# Altium PCB PCB1.PcbDoc
Units mil, origin at the board's own origin, x right, y up, seen from the top; angles counter-clockwise.
Board outline 3800 x 3800 mil, 4 copper layers (Top Layer, Int1 (GND), Int2 (PWR), Bottom Layer), stack 53.912 mil thick; 44 components, 44 nets, 213 pads, 82 vias.
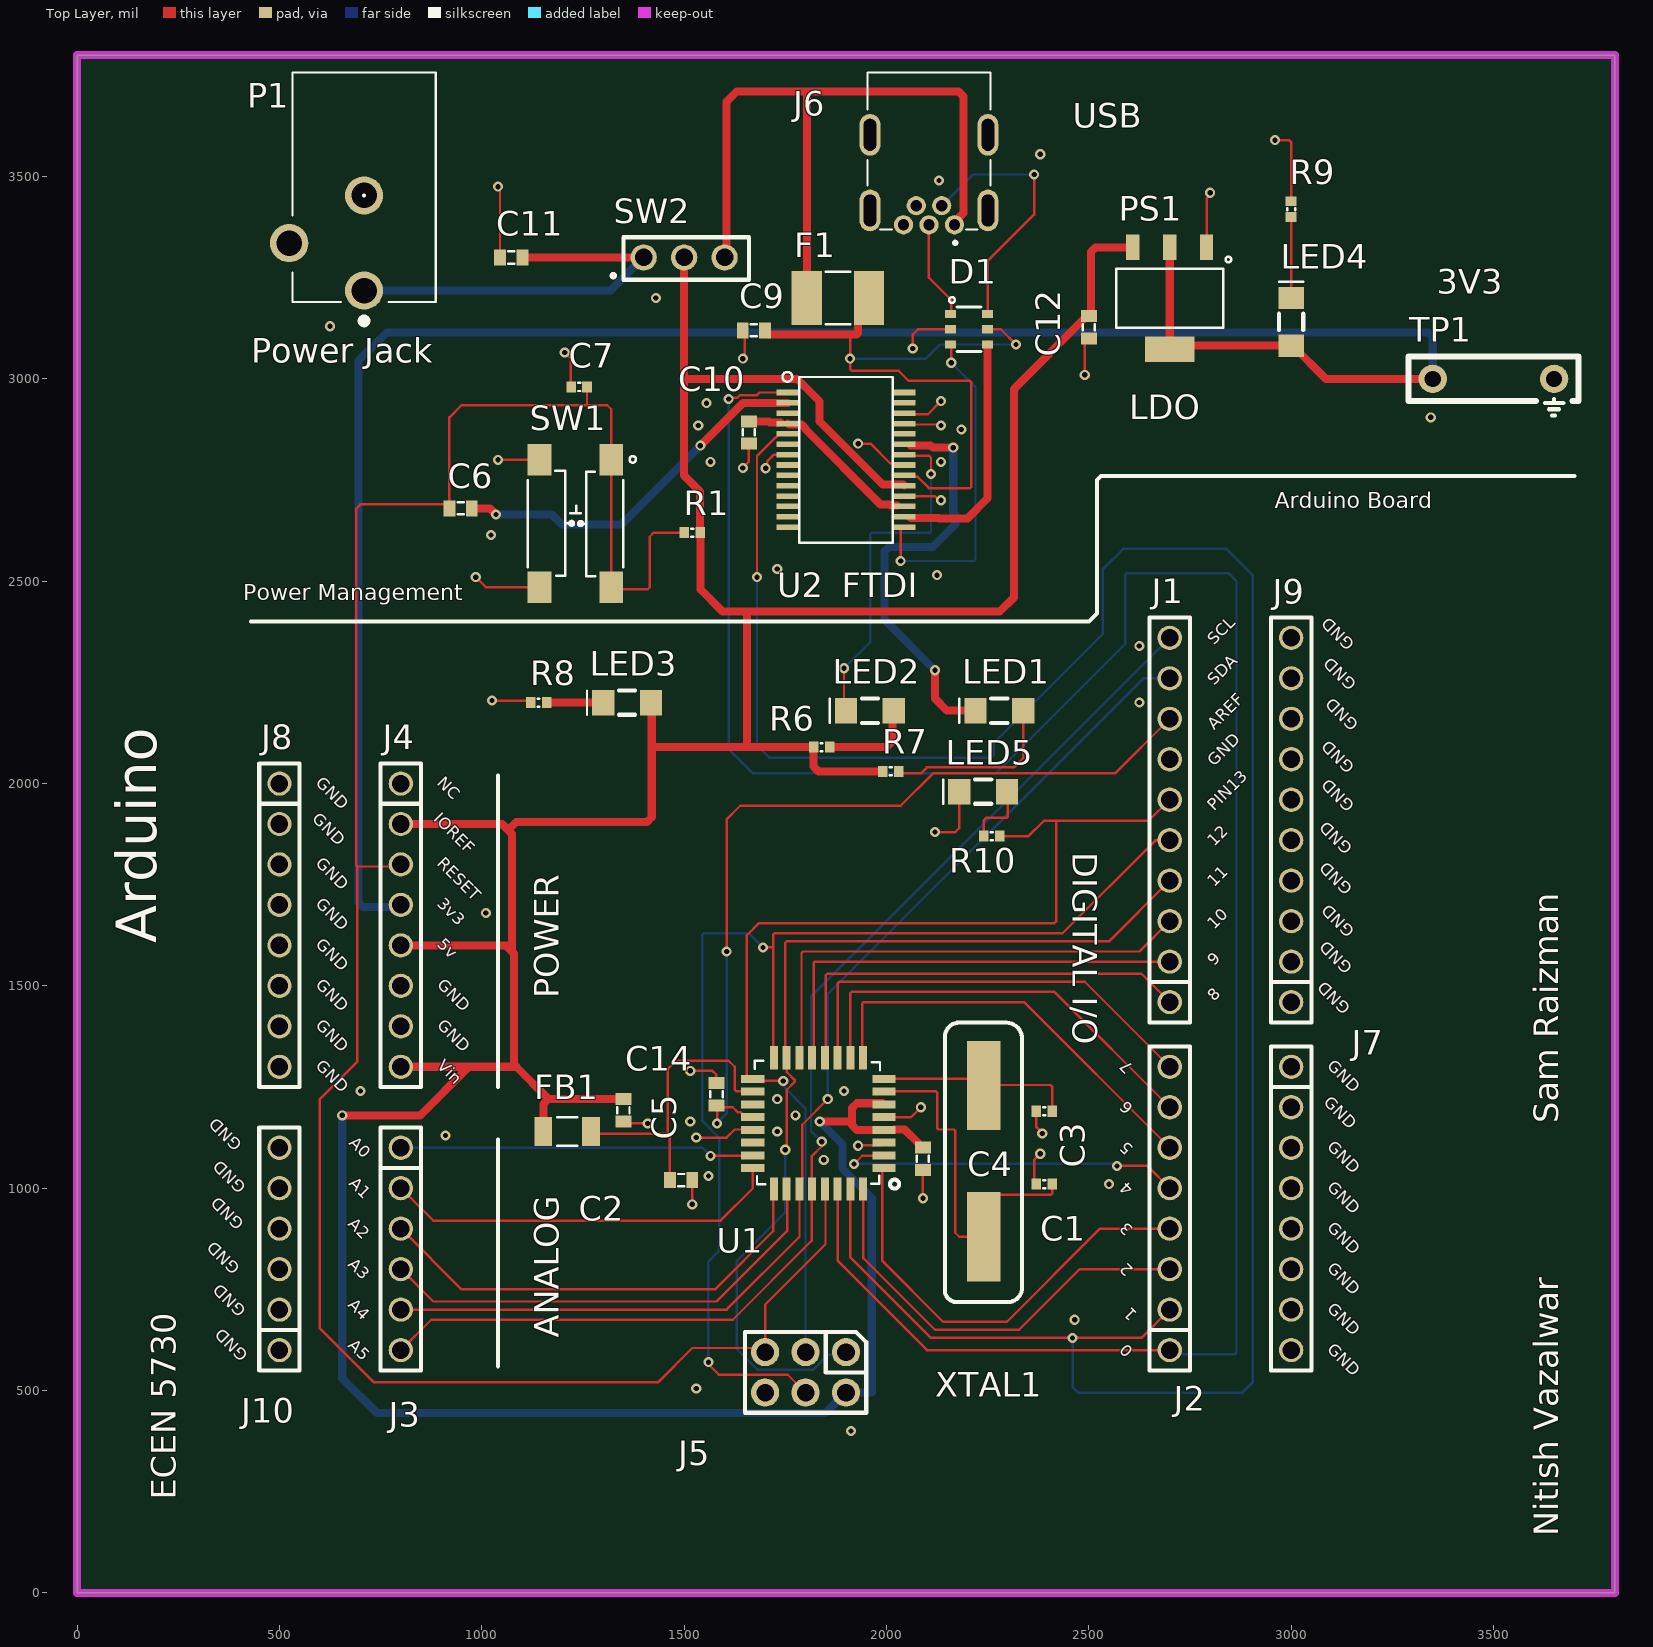
[diagram p0: Top Layer view]
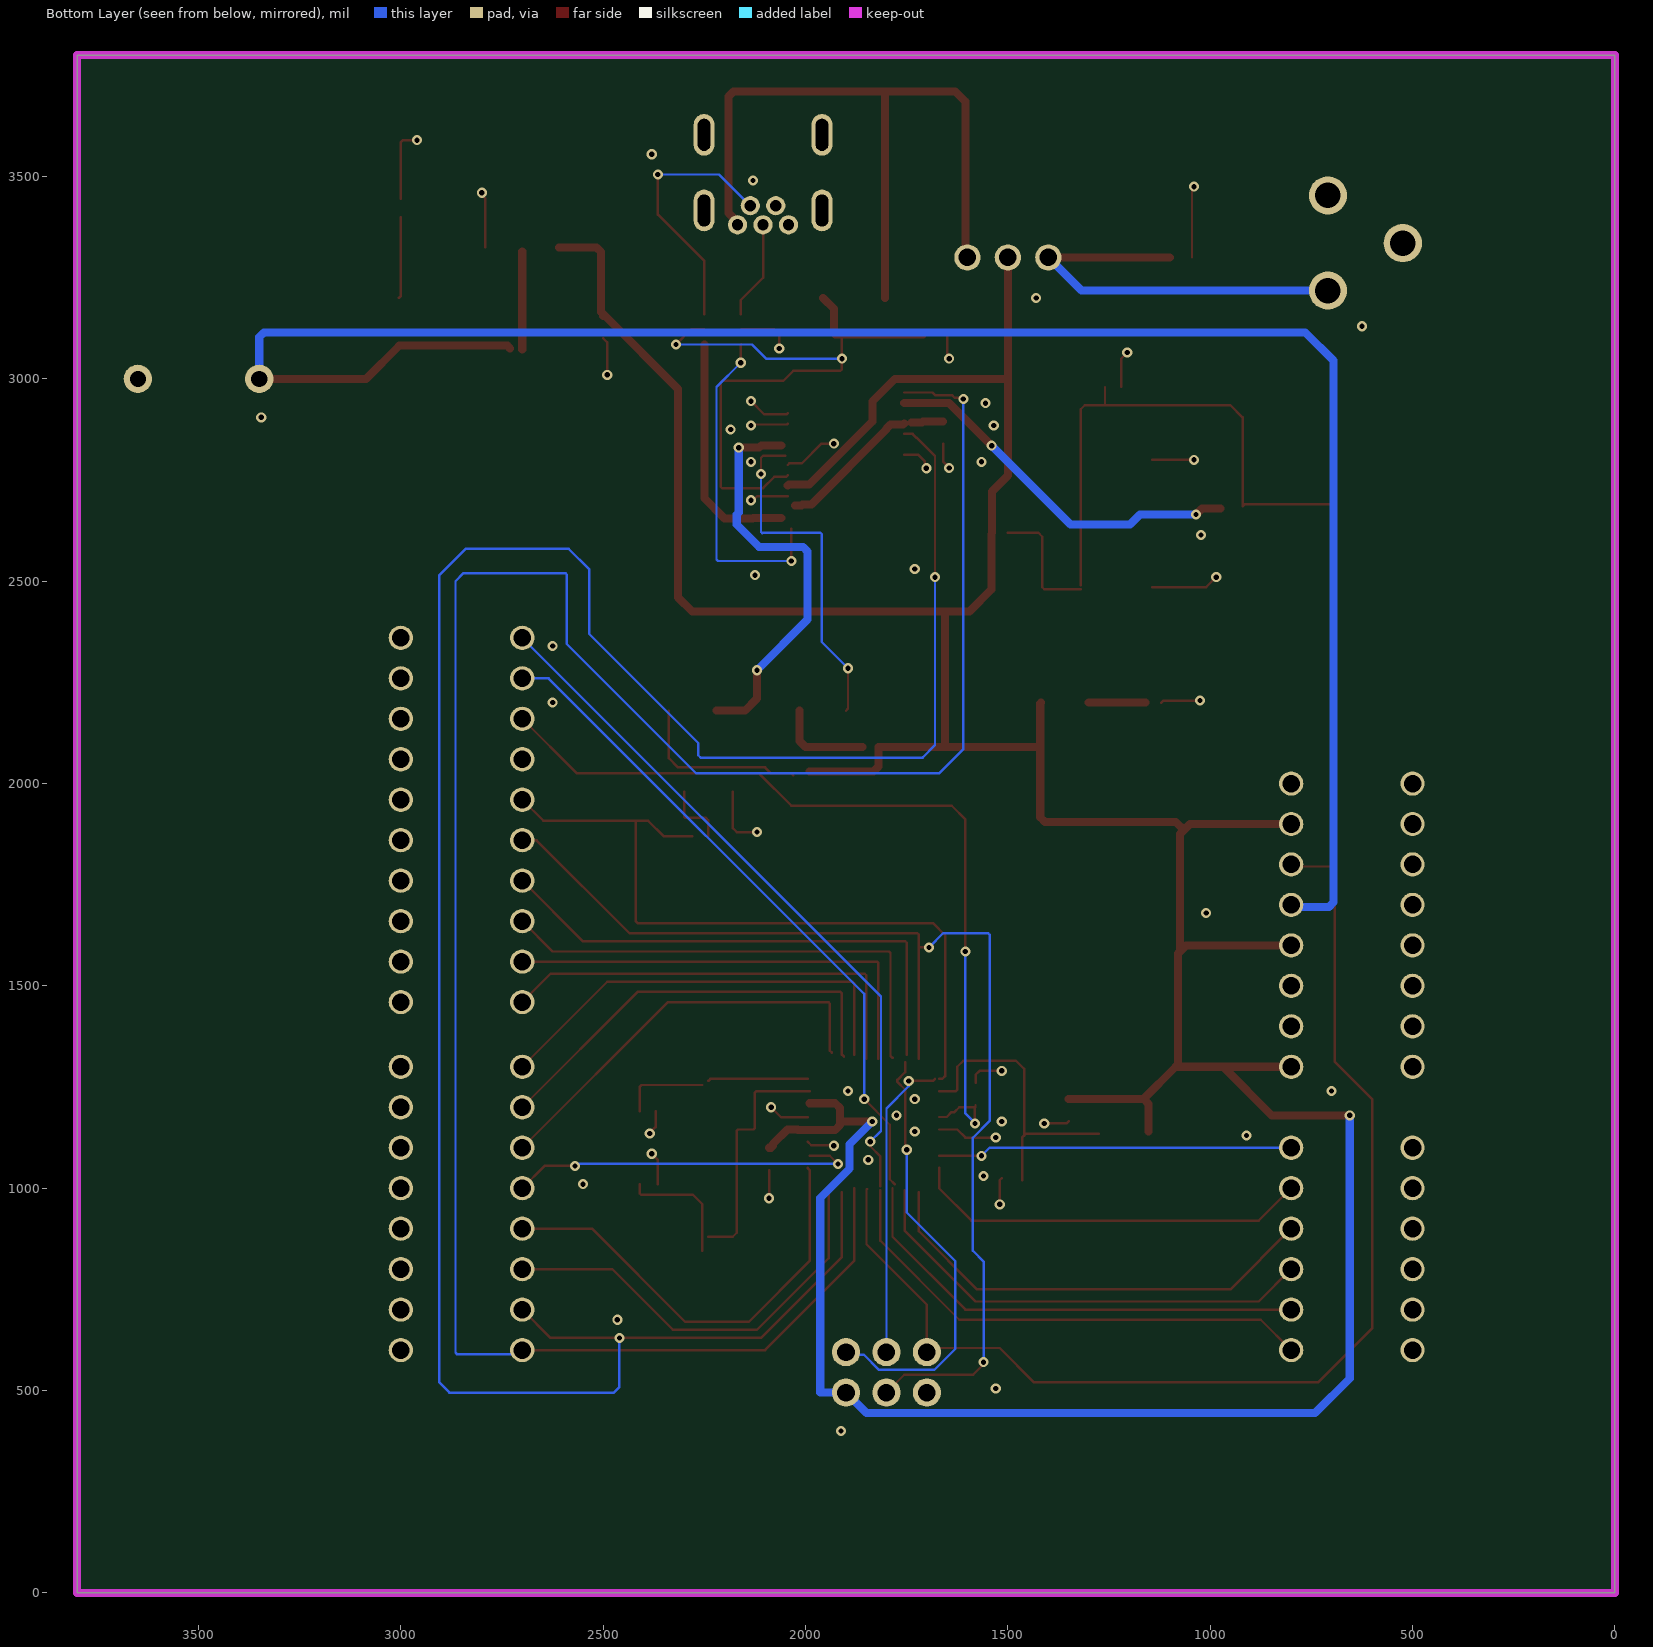
[diagram p1: Bottom Layer view, seen from below]
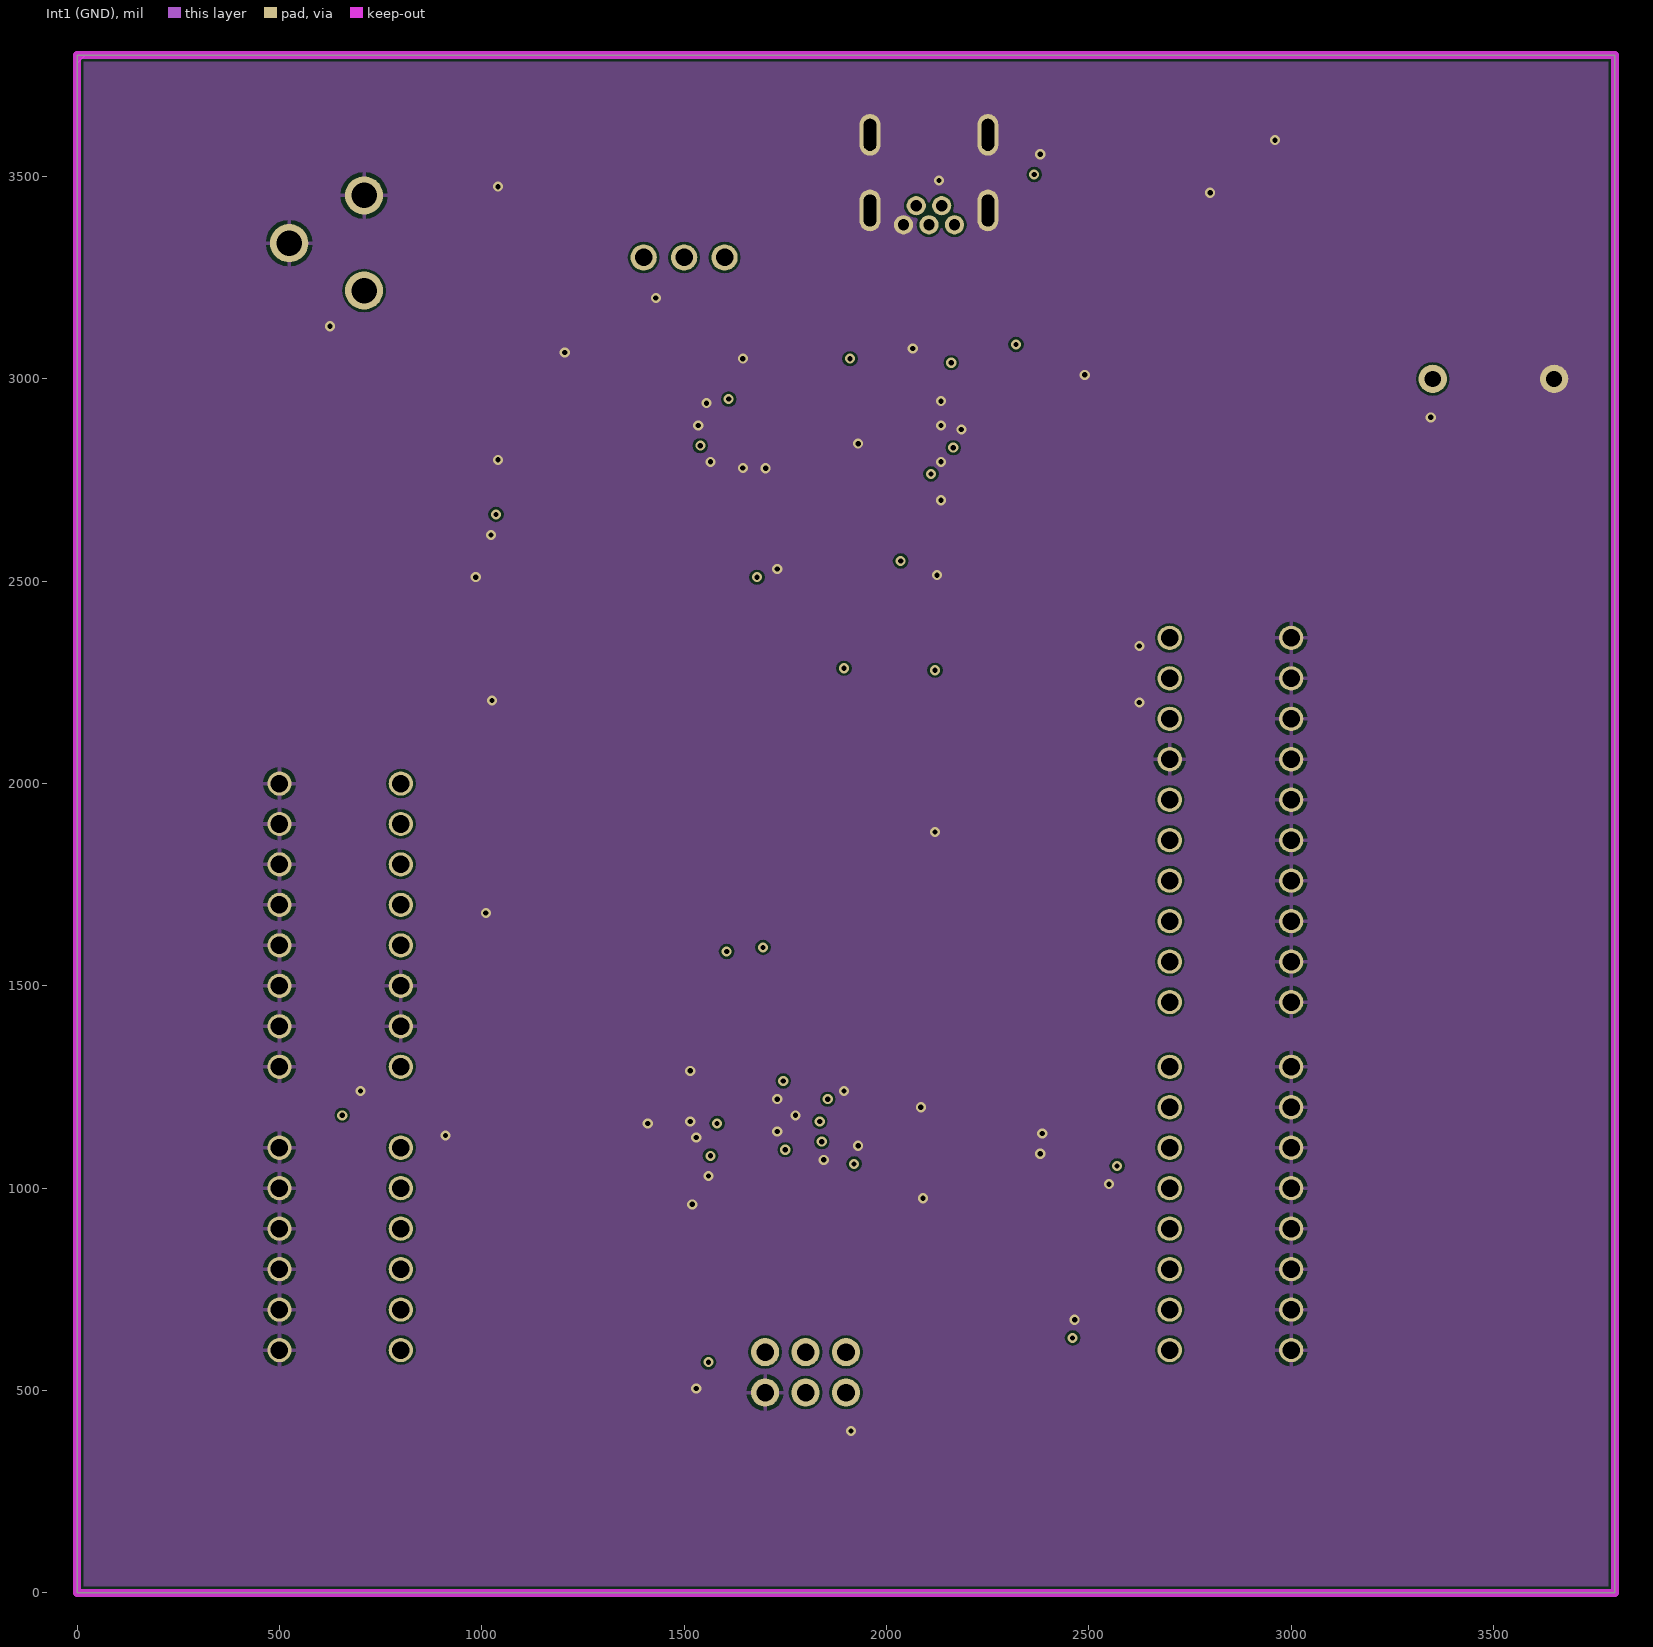
[diagram p2: Int1 (GND)]
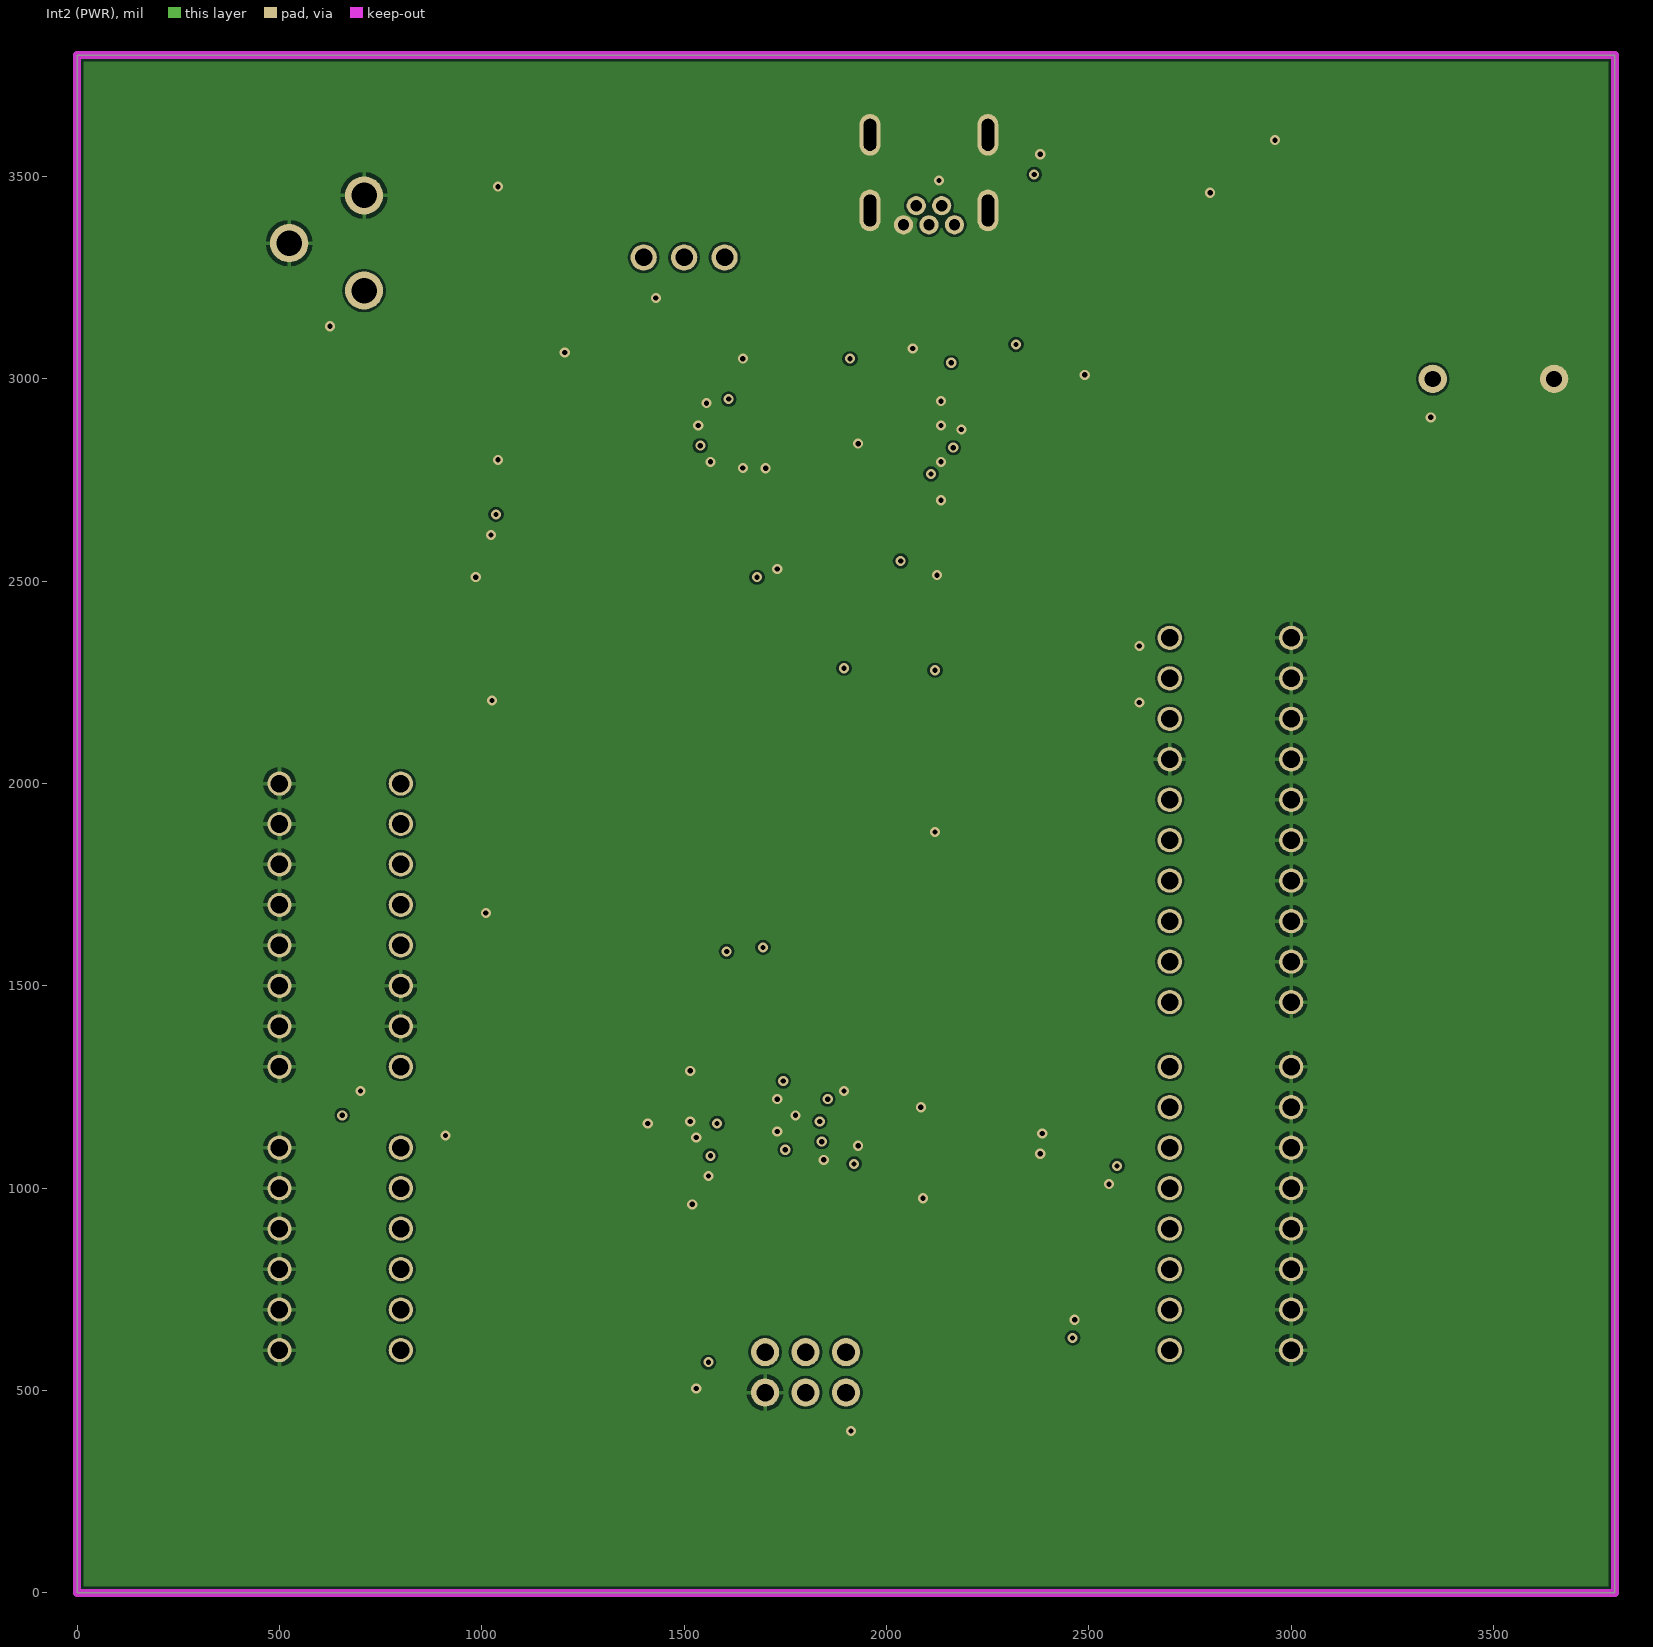
[diagram p3: Int2 (PWR)]

## Layer stack, top to bottom
Top Solder: solder mask 1, SM-001, Dk 4
Top Layer: signal copper 1.378
Dielectric 1: prepreg 5.1, PP-017, Dk 4.3
Dielectric 2: prepreg 5.1, PP-017, Dk 4.3
Int1 (GND): signal copper 1.378
Dielectric 3: core 28, Core-039, Dk 4.8
Int2 (PWR): signal copper 1.378
Dielectric 4: prepreg 5.1, PP-017, Dk 4.3
Dielectric 5: prepreg 5.1, PP-017, Dk 4.3
Bottom Layer: signal copper 1.378
Bottom Solder: solder mask 1, SM-001, Dk 4

## Board outline
0,0 3800,0 3800,3800 0,3800

## Design rules (kind name [scope] priority, off if disabled: settings)
Clearance [All] p1: gap=6 ignorepadtopadclearanceinfootprint=FALSE
PlaneClearance [All] p1: clearance=10
PlaneConnect [All] p1: planeconnectstyle=Direct reliefexpansion=20 reliefentries=4 reliefconductorwidth=10 reliefairgap=10
PolygonConnect [All] p1: connectstyle=Direct reliefconductorwidth=10 reliefentries=4 polygonreliefangle="90 Angle" airgapwidth=10
RoutingVias [All] p1: holewidth=13 width=25 viastyle="Through Hole" minholewidth=13 minwidth=25 maxholewidth=60 maxwidth=80
SolderMaskExpansion [All] p1: expansion=4 istentingtop=FALSE
UnRoutedNet [All] p1: checkbadconnections=TRUE
Width "Schematic Width Constraint_2" [InNet('5V')] p1: maxlimit=100 minlimit=10 preferedwidth=20 midlayer1_maxwidth=10 midlayer1_prefwidth=10 midlayer2_maxwidth=10 midlayer2_prefwidth=10 minimp=50.000000 maximp=50.000000 favimp=50.000000
Width "Schematic Width Constraint_1" [InNet('USB_PWR')] p2: maxlimit=100 minlimit=10 preferedwidth=20 midlayer1_maxwidth=10 midlayer1_prefwidth=10 midlayer2_maxwidth=10 midlayer2_prefwidth=10 minimp=50.000000 maximp=50.000000 favimp=50.000000
Width "Schematic Width Constraint" [InNet('NetC11_1')] p3: maxlimit=100 minlimit=10 preferedwidth=20 midlayer1_maxwidth=10 midlayer1_prefwidth=10 midlayer2_maxwidth=10 midlayer2_prefwidth=10 minimp=50.000000 maximp=50.000000 favimp=50.000000
Width [All] p4: maxlimit=100 minlimit=6 preferedwidth=10 toplayer_prefwidth=6 midlayer1_minwidth=10 midlayer1_maxwidth=10 midlayer2_minwidth=10 midlayer2_maxwidth=10 bottomlayer_prefwidth=6 minimp=50.000000 maximp=50.000000 favimp=50.000000
27 further rules are at their usual default settings.

## Components (designator, comment, footprint, x,y, rotation, side; value= is the part's Value field where it differs from the comment)
C1 "22pF" 0402_Passive#1 2370.63,1010 r0 top
C2 "22uF" 0603_PASSIVE 1520,1020 r180 top
C3 "22pF" 0402_Passive#1 2370.63,1190 r0 top
C4 "22uF" 0603_PASSIVE 2090,1100 r270 top
C5 "22uF" 0603_PASSIVE 1350,1164.88 r90 top
C6 "22uF" 0603_PASSIVE 920,2680 r0 top
C7 "1uF" 0402_Passive#2 1260,2980 r180 top
C9 "22uF" 0603_PASSIVE 1700,3120 r180 top
C10 "22uF" 0603_PASSIVE 1660,2840 r90 top
C11 "22uF" 0603_PASSIVE 1100,3300 r180 top
C12 "22uF" 0603_PASSIVE 2500,3100 r90 top
C14 "22uF" 0603_PASSIVE 1580,1204.88 r90 top
D1 "IP4234CZ6,125" TVS 2158.46,3160 r0 top value="TVS DIODE 5.5V 6TSOP"
F1 "MF-MSMF050-2" FUSE 1880,3200 r0 top value="PTC RESET FUSE 15V 500MA 1812"
FB1 "FB_300mA_1206" 1206_Passive 1270,1140 r180 top
J1 "PPTC101LFBN-RC digital" 10_PIN_ARDUINO_100MIL 2700,1460 r90 top value=Female
J2 "PPTC081LFBN-RC" 8_PIN_ARDUINO_100MIL 2700,600 r90 top value=Female
J3 "PPTC061LFBN-RC analog" 6_PIN_ARDUINO_100mil 800,1100 r270 top value=Female
J4 "PPTC081LFBN-RC Power" 8_PIN_ARDUINO_100MIL 800,2000 r270 top value=Female
J5 "NRPN032PAEN-RC" ICSP 1900,595 r270 top
J6 "XM7D-0512" USB_2 2100,3571.21 r0 top value="CONN RCPT USB2.0 MINI B 5P R/A"
J7 "PPTC081LFBN-RC" 8_PIN_ARDUINO_100MIL 3000,1300 r270 top value=Female
J8 "PPTC081LFBN-RC" 8_PIN_ARDUINO_100MIL 500,2000 r270 top value=Female
J9 "PPTC101LFBN-RC" 10_PIN_ARDUINO_100MIL 3000,1460 r90 top value=Female
J10 "PPTC061LFBN-RC" 6_PIN_ARDUINO_100mil 500,600 r90 top value=Female
LED1 "LTST-C150CKT" LED 2220,2180 r90 top value=Blue
LED2 "LTST-C150CKT" LED 1900,2180 r90 top value=Blue
LED3 "LTST-C150CKT" LED 1300,2200 r90 top value=Red
LED4 "LTST-C150CKT" LED 3000,3200 r0 top
LED5 "LTST-C150CKT" LED 2180,1980 r90 top
P1 "Power Jack" Power_Jack 709,3218.3 r90 top value="CONN PWR JACK 2X5.5MM SOLDER"
PS1 "AZ1117CH-3.3TRG1" LDO 2700,3200 r0 top value="IC REG LINEAR 3.3V 800MA SOT223"
R1 "1k" 0402_Passive#1 1500,2620 r0 top value="1K Ohm"
R6 "1k" 0402_Passive#1 1820,2090 r0 top value="1K Ohm"
R7 "1k" 0402_Passive#1 1990.63,2030 r0 top value="1K Ohm"
R8 "1k" 0402_Passive#1 1120.63,2200 r0 top value="1K Ohm"
R9 "1k" 0402_Passive#1 3000,3400 r90 top value="1K Ohm"
R10 "1k" 0402_Passive#1 2240.63,1870 r0 top value="1K Ohm"
SW1 "TL3305AF160QG" Switch_JLC 1320,2800 r270 top value="SWITCH TACTILE SPST-NO 50MA 12V"
SW2 "PREC003SAAN-RC" 3_PIN_100mil 1400,3300 r0 top value="CONN HEADER VERT 3POS 2.54MM"
TP1 "10x Probe TP" TP10x_Probe 3500,3000 r0 top
U1 "ATMEGA328P-ANR" ATMega328P 1830,1160 r0 top value="IC MCU 8BIT 32KB FLASH 32TQFP"
U2 "FT232RL-REEL" FTDI 1900,2800 r0 top value="IC USB FS SERIAL UART 28-SSOP"
XTAL1 "ABLS-16.000MHZ-B4-T" Crystal 2240,1254.02 r270 top value="CRYSTAL 16.0000MHZ 18PF SMD"

## Footprints (in the part's own frame and the unit in brackets; to place one, negate y for a bottom-side part, rotate by r counter-clockwise, add the part's x,y. Pads: shape width x height; smd on the part's side, far side on the other; paste and mask are expansions set on the pad)
3_PIN_100mil [mm]
  round 1.65 hole 1.1: 1(0,0) 2(2.54,0) 3(5.08,0)
  silkscreen extent -2,-1.4 6.6,1.27
6_PIN_ARDUINO_100mil [mil]
  round 60 hole 43.31: 1(0,0) 2(100,0) 3(200,0) 4(300,0) 5(400,0) 6(500,0)
  silkscreen extent -50,-50 550,50
8_PIN_ARDUINO_100MIL [mil]
  round 60 hole 43.31: 1(0,0) 2(100,0) 3(200,0) 4(300,0) 5(400,0) 6(500,0) 7(600,0) 8(700,0)
  silkscreen extent -50,-50 750,50
10_PIN_ARDUINO_100MIL [mil]
  round 60 hole 43.31: 1(0,0) 2(100,0) 3(200,0) 4(300,0) 5(400,0) 6(500,0) 7(600,0) 8(700,0) 9(800,0) 10(900,0)
  silkscreen extent -50,-50 950,50
0402_Passive#1 [mm] "Reference: https://www.worthingtonassembly.com/perfect-0402-footprint"
  rect 0.6x0.7 smd mask+0: 1(0,0) 2(1,0)
  silkscreen extent 0.43,-0.25 0.56,0.25
0402_Passive#2 [mm] "Reference: https://www.worthingtonassembly.com/perfect-0402-footprint"
  rect 0.6x0.7 smd: 1(0,0) 2(1,0)
  silkscreen extent 0.43,-0.25 0.56,0.25
0603_PASSIVE [mm] "Reference: http://livepartlibrary.com/fpdimensions.html"
  rect 0.75x1 smd: 1(0,0) 2(1.4,0)
  silkscreen extent 0.51,-0.38 0.89,0.38
1206_Passive [mil]
  rect 44x71 smd: 1(0,0) 2(118,0)
  silkscreen extent 34,-35 84,35
ATMega328P [mil]
  rect 58x20 smd mask+1: 1(163.93,-110) 2(163.93,-79) 3(163.93,-47) 4(163.93,-16) 5(163.93,16) 6(163.93,47) 7(163.93,79) 8(163.93,110) 17(-160.07,110) 18(-160.07,79) 19(-160.07,47) 20(-160.07,16) 21(-160.07,-16) 22(-160.07,-47) 23(-160.07,-79) 24(-160.07,-110)
  rect 20x58 smd mask+1: 9(111.93,162) 10(80.93,162) 11(48.93,162) 12(17.93,162) 13(-14.07,162) 14(-45.07,162) 15(-77.07,162) 16(-108.07,162) 25(-108.07,-162) 26(-77.07,-162) 27(-45.07,-162) 28(-14.07,-162) 29(17.93,-162) 30(48.93,-162) 31(80.93,-162) 32(111.93,-162)
  silkscreen extent -155,-161 201,155
Crystal [mm]
  rect 5.6x2.1 smd: 1(0,0) 2(9.5,0)
  silkscreen extent -3.95,-2.41 13.6,2.41
FTDI [mil]
  rect 55x13.7 smd mask+1: 1(-143.94,166.34) 2(-143.94,140.75) 3(-143.94,115.16) 4(-143.94,89.57) 5(-143.94,63.98) 6(-143.94,38.39) 7(-143.94,12.8) 8(-143.94,-12.8) 9(-143.94,-38.39) 10(-143.94,-63.98) 11(-143.94,-89.57) 12(-143.94,-115.16) 13(-143.94,-140.75) 14(-143.94,-166.34) 15(143.94,-166.34) 16(143.94,-140.75) 17(143.94,-115.16) 18(143.94,-89.57) 19(143.94,-63.98) 20(143.94,-38.39) 21(143.94,-12.8) 22(143.94,12.8) 23(143.94,38.39) 24(143.94,63.98) 25(143.94,89.57) 26(143.94,115.16) 27(143.94,140.75) 28(143.94,166.34)
  silkscreen extent -157,-205 115,217
FUSE [mm]
  rect 1.9x3.4 smd: 1(-1.95,0) 2(1.95,0)
  silkscreen extent -0.76,-1.65 0.76,1.65
ICSP [mil]
  round 70 hole 43.31: 1(0,0) 2(0,-100) 3(0,-200) 4(100,0) 5(100,-100) 6(100,-200)
  silkscreen extent -50,-250 150,50
LDO [mil]
  rect 33x63 smd: 1(91,124.94) 2(0,124.94) 3(-91,124.94)
  rect 122x63 smd: 4(0,-127.06)
  silkscreen extent -132,-74 152,102
LED [mil]
  rect 63x55 smd: 1(0,0) 2(0,-118)
  silkscreen extent -30,-79 30,40
Power_Jack [mm]
  round 2.4 hole 1.6: 1(0,0) 2(5.969,0) 3(2.977,4.7)
  silkscreen extent -2.1,-4.5 13.68,4.5
Switch_JLC [mm]
  rect 2x1.5 smd: 1(0,0) 2(8,0) 3(0,-4.5) 4(8,-4.5)
  silkscreen extent -0.23,-5.26 7.32,1.55
TP10x_Probe [mil] "Small Probs footprint"
  round 70 hole 40: 1(-150,0) 2(150,0)
  silkscreen extent -210,-90 210,55
TVS [mm]
  rect 0.7x0.508 smd mask+0.025: 1(0,0) 2(0,-0.95) 3(0,-1.9) 4(2.325,-1.9) 5(2.325,-0.95) 6(2.325,0)
  silkscreen extent -0.09,-2.35 1.91,1.06
USB_2 [mm]
  round 1.208 hole 0.7: 1(1.727,-4.837) 2(0.927,-3.637) 3(0.127,-4.837) 4(-0.673,-3.637) 5(-1.473,-4.837)
  oval 1.308x2.616 hole 0.8 slot 2 at 90 deg: SH1(-3.573,0.813) SH2(-3.573,-3.937) SH3(3.827,-3.937) SH4(3.827,0.813)
  silkscreen extent -3.72,-6.07 3.98,4.71

## Part data
C1 C3: library part C_22pF_0402, "MULTILAYER CERAMIC CAPACITORS MLCC - SMD/SMT 22PF 50V 0402 ROHS", LCSC Part#=C1555, MFR Part #=0402CG220J500NT, Datasheet=https://datasheet.lcsc.com/szlcsc/Guangdong-Fenghua-Advanced-Tech-0402CG220J500NT_C1555.pdf, Type=Basic
C2 C4 C5 C6 C9 C10 C11 C12 C14: library part C_22uF_0603, "MULTILAYER CERAMIC CAPACITORS MLCC - SMD/SMT 22UF 6.3V 0603 ROHS", LCSC Part#=C59461, MFR Part #=CL10A226MQ8NRNC, Datasheet=https://datasheet.lcsc.com/szlcsc/Samsung-Electro-Mechanics-CL10A226MQ8NRNC_C59461.pdf, Type=Basic
C7: library part C_1uF_0402, "MULTILAYER CERAMIC CAPACITORS MLCC - SMD/SMT 1UF 25V 0402 ROHS", LCSC Part#=C52923, MFR Part #=CL05A105KA5NQNC, Datasheet=https://datasheet.lcsc.com/szlcsc/Samsung-Electro-Mechanics-CL05A105KA5NQNC_C52923.pdf, Type=Basic
D1: library part D_TVS_Diode, "Clamp Ipp Tvs Diode Surface Mount 6-TSOP", LCSC Part#=C455086, Digikey Link=https://www.digikey.com/product-detail/en/IP4234CZ6%2c125/1727-4717-1-ND/2531156/?itemSeq=304982369, Digikey Part=1727-4717-1-ND, MFR Part #=IP4234CZ6,125, Type=Extended
F1: library part F_Polyswitch_500mA, "Polymeric PTC Resettable Fuse 15V 500mA Ih Surface Mount 1812 (4532 Metric), Concave", LCSC Part#=C12558, MFR Part #=SMD1812P050TF, Digikey Link=https://www.digikey.com/product-detail/en/MF-MSMF050-2/MF-MSMF050-2CT-ND/662842/?itemSeq=304982360, Digikey Part=MF-MSMF050-2CT-ND, Type=Extended
FB1: "Ferrite Bead. 2 kOhms @ 30MHz, 500mOhm", MFR Part #=NA, Digikey Link=https://www.digikey.com/product-detail/en/laird-signal-integrity-products/HZ1206C202R-10/240-2413-1-ND/806773
J1 J9: library part JF_10_PIN_FEMALE_ARDUINO, "10 Position Header Connector 0.100\" (2.54mm) Through Hole Tin", Digikey Link=https://www.digikey.com/product-detail/en/PPTC101LFBN-RC/S7008-ND/810149/?itemSeq=304982352, Digikey Part=S7008-ND
J2 J4 J7 J8: library part JF_8_PIN_FEMALE_ARDUINO, "8 Position Header Connector 0.100\" (2.54mm) Through Hole Tin", Digikey Link=https://www.digikey.com/product-detail/en/PPTC081LFBN-RC/S7006-ND/810147/?itemSeq=304982354, Digikey Part=S7006-ND
J3 J10: library part JF_6_PIN_FEMALE_ARDUINO, "6 Position Header Connector 0.100\" (2.54mm) Through Hole Tin", Digikey Link=https://www.digikey.com/product-detail/en/PPTC061LFBN-RC/S7004-ND/810145/?itemSeq=304982353, Digikey Part=S7004-ND
J5: library part J_ICSP, "Connector Header Through Hole 6 position 0.079\" (2.00mm)", Digikey Link=https://www.digikey.com/product-detail/en/NRPN032PAEN-RC/S5801-03-ND/804955/?itemSeq=304982355, Digikey Part=S5801-03-ND
J6: library part J_USB_2_B_Mini, "USB - mini B USB 2.0 Receptacle Connector 5 Position Through Hole, Right Angle", Digikey Link=https://www.digikey.com/product-detail/en/XM7D-0512/OR1205-ND/4695531/?itemSeq=304982356, Digikey Part=OR1205-ND
LED1 LED2: library part LED_BLUE_1206, "Blue LED Indicator"
LED3: library part LED_RED_1206, "Red 638nm LED Indication - Discrete 1.8V 1206 (3216 Metric)", Digikey Link=https://www.digikey.com/product-detail/en/LTST-C150CKT/160-1167-1-ND/269239/?itemSeq=304982368, Digikey Part=160-1167-1-ND
LED4 LED5: library part LED_GREEN_1206, "Green LED Indicator"
P1: library part "P_Power Jack", "Power Barrel Connector Jack 2.10mm ID (0.083\"), 5.50mm OD (0.217\") Through Hole, Right Angle", Digikey Link=https://www.digikey.com/product-detail/en/PJ-102A/CP-102A-ND/275425/?itemSeq=304982367, Digikey Part=CP-102A-ND
PS1: library part PS_LDO_3v3, "Linear Voltage Regulator IC Positive Fixed 1 Output 1A SOT-223", LCSC Part#=C108492, MFR Part #=AZ1117CH2-3.3TRG1, Digikey Link=https://www.digikey.com/product-detail/en/AZ1117CH-3.3TRG1/AZ1117CH-3.3TRG1DICT-ND/4505206/?itemSeq=304982370, Digikey Part=AZ1117CH-3.3TRG1DICT-ND, Type=Extended
R1 R6 R7 R8 R9 R10: library part R_1K_0402, "1 kOhms chip resistor SURFACE MOUNT 1KOHMS ±1% 1/16W 0402 ROHS", LCSC Part#=C11702, MFR Part #=0402WGF1001TCE, Datasheet=https://datasheet.lcsc.com/szlcsc/Uniroyal-Elec-0402WGF1001TCE_C11702.pdf, Type=Basic
SW1: library part SW_Push_Button_JLC, "Tactile Switch SPST-NO Top Actuated Surface Mount", LCSC Part#=C620316, MFR Part #=UK-B0228-G5-160-JZ, Digikey Link=https://www.digikey.com/product-detail/en/TL3305AF160QG/EG5350CT-ND/5816195/?itemSeq=304982361, Digikey Part=EG5350CT-ND, Type=Basic
SW2: library part SW_3Pin_100mil_Switch, "Connector Header Through Hole 3 position 0.100\" (2.54mm)", Digikey Link=https://www.digikey.com/product-detail/en/PREC003SAAN-RC/S1012EC-03-ND/2774851/?itemSeq=304982371, Digikey Part=S1012EC-03-ND
TP1: library part TP_10x_Probe, "Test Point 300 mil centers"
U1: library part U_ATMega328P, "AVR AVR® ATmega Microcontroller IC 8-Bit 20MHz 32KB (16K x 16) FLASH 32-TQFP (7x7)", LCSC Part#=C14877, MFR Part #=ATMEGA328P-AU, Digikey Link=https://www.digikey.com/product-detail/en/ATMEGA328P-ANR/ATMEGA328P-ANRCT-ND/2774230/?itemSeq=304982365, Type=Basic
U2: library part U_FTDI232, "USB Bridge, USB to UART USB 2.0 UART Interface 28-SSOP", LCSC Part#=C8690, Digikey Link=https://www.digikey.com/product-detail/en/FT232RL-REEL/768-1007-1-ND/1836402/?itemSeq=304982359, Digikey Part=768-1007-1-ND, MFR Part #=FT232RL-REEL, Type=Basic
XTAL1: library part XTAL_16MHz, "16MHz ±30ppm Crystal 18pF 40 Ohms HC-49/US. Use for ECEN 4/5730 Arduino", Digikey Link=https://www.digikey.com/product-detail/en/ABLS-16.000MHZ-B4-T/535-10226-1-ND/2184261/?itemSeq=304982364, Digikey Part=535-10226-1-ND

## Via types
v1: diameter 25, hole 13, Top Layer to Bottom Layer, 82 vias

## Nets (pads, with @x,y where several pads share a name; then routed paths per layer and width w, separated by ;. In a path a pad name is that pad's centre, name@x,y a point inside that pad or via, vN(x,y) a via of type N, cw(c..) or ccw(c..) an arc to the next point about the centre after c; other vN are vias at no path point)
3V3: J4.4 LED4.2 PS1.2 PS1.4 TP1.1 | length 5141.3
  Top Layer w20: PS1.4 PS1.2@2700,3315 ; PS1.4@2730,3075 2737,3082 LED4.2 3004,3082 3086,3000 TP1.1
  Bottom Layer w20: J4.4 795,1695 706.72,1695 695,1706.72 695,3045 765,3115 3338.28,3115 3350,3103.28 TP1.1
5V: C4.1 C5.2 C12.2 FB1.2 J4.2 J4.5 J4.8 J5.4 LED3.2 PS1.3 R1.2 R6.1 R7.1 SW2.2 U1.4 U1.6 U2.19 | length 10293.8
  Top Layer w20: v1(655,1180) 847.95,1180 966.21,1298.26 ; J4.8 1080,1300 ; J4.5 1060,1600 1075,1585 ; J4.2 1050,1900 1065,1885 ; FB1.2 1152,1208.28 1163.72,1220 1165,1220 ; C5.2 1165,1220 ; LED3.2 1420,2198 1420,2085 ; SW2.2 1500,3000 ; R1.2 1539.37,2722.13 1500,2761.5 1500,3000 ; R1.2@1540,2615 1540,2480 1595,2425 1655,2425 ; v1(1835,1165) 1915,1165 ; U1.6@1990,1210 1926.72,1210 1915,1198.28 1915,1165 ; R7.1 1831.72,2030 1820,2041.72 R6.1 1655,2090 ; U2.19 2041.2,2738.76 1990.93,2738.76 1835,2894.7 1835,2944.38 1779.38,3000 1500,3000 ; C4.1 2085.08,1100 2080.31,1104.76 2080.31,1109.69 2045,1145 2019.79,1145 2018.79,1144 1926.72,1144 1915,1155.72 1915,1165 ; C12.2 2495.08,3155.12 2315,2975.04 2315,2460 2280,2425 1655,2425 ; C12.2@2500,3160 2505,3165 2505,3313.22 2516.72,3324.94 PS1.3 ; 1065,1885 1075,1875 1075,1585 ; 1065,1885 1085,1905 1408.28,1905 1420,1916.72 1420,2085 ; 1075,1585 1080,1580 1080,1300 ; 1080,1300 1085,1300 1165,1220 ; 1420,2085 1425,2090 1655,2090 ; 1655,2090 1655,2425
  Bottom Layer w20: v1(655,1180) 655,530 741,444 1849,444 J5.4 1963.64,495 1963.64,976.06 1891.5,1048.2 1891.5,1108.5 v1(1835,1165)
AD0: J3.1 U1.23 | length 878.3
  Top Layer w6: v1(1565,1080) U1.23@1670,1080
  Bottom Layer w6: J3.1 1545,1100 v1(1565,1080)
AD1: J3.2 U1.24 | length 986.3
  Top Layer w6: J3.2 880,920 1590,920 1670,1000 U1.24@1670,1050
AD2: J3.3 U1.25 | length 1138.1
  Top Layer w6: J3.3 950,750 1576.49,750 1720,893.51 U1.25@1720,990
AD3: J3.4 U1.26 | length 1160.6
  Top Layer w6: J3.4 880,720 1580,720 1755,895 U1.26@1755,995
AD4-SDA: J1.9 J3.5 U1.27 | length 2848.7
  Top Layer w6: J3.5 1605,700 1785,880 U1.27@1785,1000 ; U1.27@1780,1010 1791.93,1021.93 1791.93,1156.93 v1(1855,1220)
  Bottom Layer w6: v1(1855,1220) 1855,1480 2635,2260 J1.9
AD5-SCL: J1.10 J3.6 U1.28 | length 2995.4
  Top Layer w6: J3.6 875,675 1620,675 1815,870 U1.28@1815,995 ; U1.28@1815,1005 1815,1078.51 1840,1103.51 v1(1840,1115)
  Bottom Layer w6: v1(1840,1115) 1813.5,1141.5 1813.5,1473.5 J1.10
AREF: C14.1 J1.8 U1.20 | length 2104.5
  Top Layer w6: C14.1 C14.1@1580,1200 ; v1(1581.5,1160) 1581.5,1198.5 C14.1@1580,1200 ; v1(1605,1585) 1605,1911.49 1638.51,1945 2035,1945 2115,2025 2565,2025 J1.8 ; U1.20 1650.93,1176 1638.93,1188 1632,1188 1620,1200 C14.1@1580,1200
  Bottom Layer w6: v1(1581.5,1160) 1581.5,1161.5 1605,1185 v1(1605,1585)
D+: D1.1 J6.3 | length 243.6
  Top Layer w6: J6.3 2105,3250 2160,3195 D1.1@2160,3160
D-: D1.6 J6.2 | length 653.7
  Top Layer w6: D1.6 2250,3291 2365,3406 v1(2365,3505)
  Bottom Layer w6: J6.2@2135,3430 2138.48,3430 2213.48,3505 v1(2365,3505)
DTR: C6.2 U2.2 | length 922.2
  Top Layer w20: C6.2@975,2680 C6.2 1019.88,2680 1034.88,2665 v1(1035,2665) ; v1(1540,2835) 1645.75,2940.75 U2.2
  Bottom Layer w20: v1(1035,2665) 1173.18,2665 1198.18,2640 1345,2640 v1(1540,2835)
GND: C1.1 C2.1 C3.1 C4.2 C5.1 C7.2 C9.2 C10.1 C11.2 C12.1 C14.2 D1.2 J1.7 J4.6 J4.7 J5.6 J6.5 J6.SH1 J6.SH2 J6.SH3 J6.SH4 J7.1 J7.2 J7.3 J7.4 J7.5 J7.6 J7.7 J7.8 J8.1 J8.2 J8.3 J8.4 J8.5 J8.6 J8.7 J8.8 J9.1 J9.2 J9.3 J9.4 J9.5 J9.6 J9.7 J9.8 J9.9 J9.10 J10.1 J10.2 J10.3 J10.4 J10.5 J10.6 LED5.1 P1.2 P1.3 PS1.1 R8.1 R9.2 SW1.3 SW1.4 TP1.2 U1.3 U1.5 U1.21 U2.7 U2.18 U2.21 U2.25 U2.26 | length 2734.5
  Top Layer w6: v1(985,2510) 1010,2485 SW1.4 SW1.4 ; v1(1025,2205) 1115.63,2205 R8.1 ; v1(1040,2800) SW1.3 ; v1@1040,3480 1040,3479.86 1044.88,3474.98 C11.2 ; v1(1205,3065) 1205,3064.59 1220,3049.59 C7.2@1220,2980 ; C5.1@1350,1165 1355,1160 v1(1410,1160) ; C2.1@1515,1025 C2.1 v1(1520,960) ; v1(1515,1290) 1570,1290 1579.75,1280.25 1579.75,1260.25 C14.2 ; v1(1530,1125) 1605,1125 1625,1145 U1.21@1670,1145 ; C9.2 1650,3114.88 1650,3055 v1(1645,3050) ; v1(1645,2780) 1645,2780.41 1660,2795.41 C10.1 ; v1(1701.5,2779.01) 1705.14,2782.64 1705.14,2796.08 1721.85,2812.8 U2.7 ; v1(1930,1105) 1931,1106 1986,1106 U1.3@1995,1115 ; v1(1930,2840) 1960.54,2840 2009.48,2791.06 2040.09,2791.06 U2.21 ; U1.5@1995,1175 2060,1175 v1(2085,1200) ; U2.18 2119.43,2710.43 2129.86,2700 v1(2135,2700) ; U2.25 2046.22,2887.28 2132.72,2887.28 v1(2135,2885) ; U2.26 2046.52,2912.58 2102.58,2912.58 v1(2135,2945) ; v1(2065,3075) 2065,3110 2077.6,3122.6 D1.2 ; v1(2090,975) C4.2 ; v1@2125,1880 2170,1880 2180,1890 LED5.1 ; C1.1@2365,1010 2365,1069.59 2380,1084.59 v1(2380,1085) ; C3.1 2370.63,1151.04 2385,1136.67 v1(2385,1135) ; v1(2490,3010) 2490,3090 C12.1 ; PS1.1 2791,3445.86 2800,3454.86 v1(2800,3460) ; v1(2960,3590) 2995,3590 3000,3585 R9.2@3000,3445
  other v1: 1912.32,400.11 1530,505 2465,675 2550,1010 1560,1030 1845,1070 910,1130 1730,1140 1515,1165 1775,1180 1730,1220 700,1240 1895,1240 1010,1680 2120,1880 2625,2200 2625,2340 2125,2515 1730,2530 1022.96,2614.44 1565,2795 2135,2795 2185,2875 1535,2885 3345,2905 1555,2940 625,3130 1430,3200 1040,3475 2130,3490 2380,3555
IO0-RXD: J2.1 U1.30 U2.1 | length 5777.6
  Top Layer w6: v1(1610,2950) 1613.37,2953.37 1631.5,2953.37 1637.88,2959.75 1679.75,2959.75 1686.34,2966.34 U2.1 ; U1.30@1880,1000 1880,820 2100,600 J2.1
  Bottom Layer w6: v1(1610,2950) 1610,2085.01 1670.01,2025 2270,2025 2590,2345 2590,2516.49 2593.51,2520 2845,2520 2865,2500 2865,593.51 2861.49,590 2705,590 J2.1@2700,595
IO1-TXD: J2.2 U1.31 U2.5 | length 6043.4
  Top Layer w6: v1(1680,2510) 1680,2809.4 1724.84,2854.24 1725.67,2854.24 1735.41,2863.98 U2.5 ; U1.31@1910,990 1910,830 2110,630 v1(2460,630) 2630,630 J2.2
  Bottom Layer w6: v1(1680,2510) 1680,2095 1710,2065 1710,2063.51 2258.51,2063.51 2265,2070 2265,2100 2535,2370 2535,2530 2585,2580 2840,2580 2905,2515 2905,520 2880,495 2473.51,495 2460,508.51 v1(2460,630)
IO2-INT0: J2.3 U1.32 | length 1055.4
  Top Layer w6: U1.32@1943,990 1943,827 2120,650 2327.69,650 2477.69,800 J2.3
IO3-INT1: J2.4 U1.1 | length 1099.5
  Top Layer w6: U1.1@1995,1050 1990,1045 1990,820 2140,670 2297.69,670 2527.69,900 J2.4
IO4-T0: J2.5 U1.2 | length 883.1
  Top Layer w6: v1(1920,1060) 1940,1080 U1.2@1990,1080 ; v1(2570,1055) 2645,1055 J2.5
  Bottom Layer w6: v1(1920,1060) 2565,1060 v1(2570,1055)
IO5-T1: J2.6 U1.9 | length 1034.1
  Top Layer w6: U1.9@1935,1335 1940,1340 1940,1456.49 1943.51,1460 2340,1460 J2.6
IO6-AIN0: J2.7 U1.10 | length 1068.1
  Top Layer w6: U1.10@1905,1325 1910,1330 1910,1481.49 1913.51,1485 2415,1485 J2.7
IO7-AIN1: J2.8 U1.11 | length 1084.9
  Top Layer w6: U1.11@1880,1330 1880,1506.49 1883.51,1510 2490,1510 J2.8
IO8: J1.1 U1.12 | length 1086.9
  Top Layer w6: U1.12@1850,1320 1850,1526.49 1853.51,1530 2630,1530 J1.1
IO9: J1.2 U1.13 | length 1117.9
  Top Layer w6: U1.13@1820,1320 1820,1556.49 1823.51,1560 J1.2
MISO: J1.4 J5.1 U1.15 | length 2375.5
  Top Layer w6: v1(1750,1095) 1750,1100.14 1753.66,1103.8 1753.66,1243.25 1772.92,1262.51 1772.92,1267.49 1753.66,1286.75 U1.15@1753.66,1311.34 ; U1.15@1750,1330 1750,1606.49 1753.51,1610 2550,1610 J1.4
  Bottom Layer w6: v1(1750,1095) 1750,940 1630,820 1630,602.77 1681.77,551 1818.23,551 1856,588.77 1893.77,588.77 J5.1
MOSI: J1.5 J5.5 U1.16 | length 2932.8
  Top Layer w6: v1(1560,570) 1560,565 1586,539 1756,539 J5.5 ; v1(1695,1595) 1720,1595 ; U1.16@1720,1320 1720,1595 ; J1.5 2699.51,1859.51 2664.51,1859.51 2435,1630 1723.51,1630 1720,1626.49 1720,1595
  Bottom Layer w6: v1(1560,570) 1560,818.77 1586.5,845.27 1586.5,1124.59 1545,1166.09 1545,1626.49 1548.51,1630 1660,1630 v1(1695,1595)
NetC2_2: C2.2 FB1.1 U1.18 | length 746.5
  Top Layer w6: FB1.1@1275,1135 1455,1135 1460,1130 ; C2.2 1464.88,1125.12 1460,1130 ; U1.18@1670,1240 1628.51,1240 1625,1243.51 1625,1300 1610,1315 1480,1315 1460,1295 1460,1130
NetC10_2: C10.2 U2.4 U2.17 | length 434.9
  Top Layer w20: C10.2 1709.69,2895.12 1712.5,2892.31 U2.4@1738.56,2892.31 ; U2.4 1758.8,2886.83 1790.19,2886.83 1799.56,2877.45 1799.56,2875.44 1985,2690 2007.39,2690 2009.81,2687.58 U2.17@2026.44,2687.58
NetC11_1: C11.1 P1.1 SW2.1 | length 1027.8
  Top Layer w20: C11.1 SW2.1
  Bottom Layer w20: P1.1 1318.3,3218.3 1395,3295 SW2.1@1405,3295
NetD1_3: D1.3 U2.15 | length 823.6
  Top Layer w6: v1(2035,2550) U2.15@2035,2630 ; D1.3 2160,3083.66 v1(2160,3040)
  Bottom Layer w6: v1(2035,2550) 2216.49,2550 2220,2553.51 2220,2980 v1(2160,3040)
NetD1_4: D1.4 U2.16 | length 591.5
  Top Layer w20: U2.16@2060,2656.51 2129.24,2656.51 2130.76,2655 2200,2655 2250,2705 D1.4
NetLED1_1: LED1.1 U2.23 | length 1029.5
  Top Layer w20: U2.23@2060,2835.65 2109,2835.65 2114.65,2830 v1(2165,2830) ; v1(2120,2280) 2120,2210 2150,2180 LED1.1
  Bottom Layer w20: v1(2120,2280) 1995,2405 1995,2573.28 2006.72,2585 2115,2585 2170,2640 2170,2665 2165,2670 v1(2165,2830)
NetLED1_2: LED1.2 R7.2 | length 442.8
  Top Layer w6: R7.2@2030,2020 2035,2025 2085,2025 2100,2040 2315,2040 2338,2063 LED1.2
NetLED2_1: LED2.1 U2.22 | length 864.1
  Top Layer w6: v1(1895,2285) 1895,2185 LED2.1 ; U2.22@2050,2810 2105,2810 2110,2805 v1(2110,2765)
  Bottom Layer w6: v1(1895,2285) 1960,2350 1960,2616.49 1963.51,2620 2105,2620 2106.51,2618.49 2110,2621.97 v1(2110,2765)
NetLED2_2: LED2.2 R6.2 | length 236.8
  Top Layer w20: R6.2 2000,2090 2015,2105 LED2.2@2015,2180
NetLED3_1: LED3.1 R8.2 | length 140
  Top Layer w20: R8.2 LED3.1
NetLED4_1: LED4.1 R9.1 | length 202.1
  Top Layer w6: R9.1 3000,3205 LED4.1@3005,3200
NetLED5_2: LED5.2 R10.1 | length 164
  Top Layer w6: R10.1 2240.63,1909.37 2246.26,1915 2296.49,1915 2300,1918.51 LED5.2@2300,1980
PC6: C6.1 C7.1 J4.3 J5.3 R1.1 SW1.1 SW1.2 U1.29 | length 5493.3
  Top Layer w6: J4.3 795,1795 693.51,1795 691.76,1796.76 ; C7.1 1260,2935 ; SW1.2@1320,2480 1410,2480 1415,2485 1415,2610 1425,2620 R1.1 ; SW1.2@1320,2490 SW1.1 1320,2925 1310,2935 1260,2935 ; U1.29 1849.38,996.55 1849.38,861.32 1700,711.94 1700,600 1695,605 1520,605 1435,520 733.51,520 600,653.51 600,1220 691.76,1311.76 691.76,1796.76 ; 691.76,1796.76 690,1798.51 690,2680 700,2690 915,2690 920,2685 920,2905 950,2935 1260,2935
PIN13: J1.6 J5.2 R10.2 U1.17 | length 2610.5
  Top Layer w6: U1.17 1662,1270 1655,1277 1655,1625 1685,1655 2415,1655 2420,1660 2420,1908 ; U1.17@1680,1270 1685,1265 v1(1745,1265) ; R10.2 2351,1870 2389,1908 2420,1908 ; J1.6 2648,1908 2420,1908
  Bottom Layer w6: v1(1745,1265) 1745,1252.16 1800,1197.16 J5.2
SS: J1.3 U1.14 | length 1204.1
  Top Layer w6: U1.14 1790,1327.07 1790,1581.49 1793.51,1585 2625,1585 J1.3
USB_PWR: F1.1 J6.1 SW2.3 | length 1830.2
  Top Layer w20: SW2.3@1600,3295 1605,3300 1605,3685 1630,3710 1800,3710 ; F1.1 1803.23,3706.77 1800,3710 ; J6.1 2167.99,3388.23 2190,3410.24 2190,3698.28 2178.28,3710 1800,3710
USB_VCC: C9.1 D1.5 F1.2 U2.20 | length 1662.5
  Top Layer w6: 1910,3105 v1(1910,3050) 1910,3023.51 1913.51,3020 2025,3020 2029.99,3020.01 2055,2995 2206.49,2995 2210,2991.49 2210,2733.51 2206.49,2730 2105,2730 2077.24,2757.76 2047.79,2757.76 U2.20 ; 1926.49,3110 1930,3113.51 ; D1.5 2282.4,3122.6 v1(2320,3085)
  Top Layer w20: C9.1@1710,3110 1926.49,3110 ; 1930,3113.51 1930,3173.23 F1.2
  Bottom Layer w6: v1(1910,3050) 2097.57,3050 2132.57,3085 v1(2320,3085)
XTAL1: C1.2 U1.7 XTAL1.2 | length 902.2
  Top Layer w6: U1.7@1990,1240 2121.49,1240 2125,1236.49 2125,1148.51 2128.51,1145 2166.49,1145 2170,1141.49 2170,890 2180,880 XTAL1.2 ; XTAL1.2@2255,845 2255,960.37 2278.34,983.71 2406.49,983.71 2410,987.22 C1.2
XTAL2: C3.2 U1.8 XTAL1.1 | length 465.2
  Top Layer w6: U1.8 2235,1270 XTAL1.1@2240,1265 ; XTAL1.1@2255,1255 2405,1255 2410,1250 C3.2
pads on no net: J4.1 J6.4 U1.19 U1.22 U2.3 U2.6 U2.8 U2.9 U2.10 U2.11 U2.12 U2.13 U2.14 U2.24 U2.27 U2.28

## Polygon pours and split planes (outlines as drawn)
no net on Bottom Layer "NONET_L04_P001" (solid, pour order 1): 2750,440
GND on Int1 (GND) "GND_L02_P004" (solid, pour order 4): 3800,3800 0,3800 0,0 3800,0
no net on Int1 (GND) "NONET_L02_P002" (solid, pour order 2): 3800,0 0,0 0,3780 20,3800 3800,3800
no net on Int1 (GND) "NONET_L02_P003" (solid, pour order 3): 2840,3600
GND on Int2 (PWR) "GND_L03_P005" (solid, pour order 5): 0,0 3800,0 3800,3800 0,3800

## Keep-outs
Keep-Out Layer:
  the board outline again, w20

## Silkscreen, mask and mechanical layers (free items; w line width, h text height)
Top Overlay:
  lines w10: 430,2400 2500,2400 2520,2420 2520,2750 2530,2760 3700,2760 ; 1040,560 1040,1120 ; 1040,1250 1040,2020
  text "USB" at 2460,3620 h60
  text "3V3" at 3360,3210 h60
  text "Power Jack" at 430,3040 h60
  text "LDO" at 2600,2900 h60
  text "Arduino Board" at 2960,2680 h40
  text "FTDI" at 1890,2460 h60
  text "Power Management" at 410,2453.33 h40
  text "DIGITAL I/O" at 2460,1830 h60 r270
  text "Arduino" at 195,1605 h100 r90
  text "POWER" at 1190,1470 h60 r90
  text "Sam Raizman" at 3660,1160 h60 r90
  text "ANALOG" at 1190,630 h60 r90
  text "ECEN 5730" at 243.35,230 h60 r90
  text "Nitish Vazalwar" at 3660,140 h60 r90

## Text inside footprints (layer, text, board x,y; h text height)
J1: Top Overlay "SCL" at 2810,2340 h30 r45; Top Overlay "8" at 2810,1460 h30 r45; Top Overlay "9" at 2810,1547.24 h30 r45; Top Overlay "10" at 2810,1637.24 h30 r45; Top Overlay "11" at 2810,1742.24 h30 r45; Top Overlay "12" at 2810,1842.24 h30 r45; Top Overlay "PIN13" at 2810,1930 h30 r45; Top Overlay "GND" at 2810,2040 h30 r45; Top Overlay "AREF" at 2810,2130 h30 r45; Top Overlay "SDA" at 2810,2240 h30 r45
J2: Top Overlay "2" at 2612.93,800 h30 r135; Top Overlay "3" at 2612.93,900 h30 r135; Top Overlay "4" at 2612.93,1000 h30 r135; Top Overlay "5" at 2612.93,1100 h30 r135; Top Overlay "6" at 2612.93,1200 h30 r135; Top Overlay "7" at 2612.93,1300 h30 r135; Top Overlay "0" at 2612.93,600 h30 r135; Top Overlay "1" at 2621.61,690 h30 r135
J3: Top Overlay "A5" at 667.07,610 h30 r315; Top Overlay "A4" at 667.07,710 h30 r315; Top Overlay "A3" at 667.07,810 h30 r315; Top Overlay "A2" at 667.07,910 h30 r315; Top Overlay "A0" at 670,1110 h30 r315; Top Overlay "A1" at 670,1010 h30 r315
J4: Top Overlay "Vin" at 887.07,1300 h30 r315; Top Overlay "GND" at 887.07,1400 h30 r315; Top Overlay "GND" at 887.07,1500 h30 r315; Top Overlay "5v" at 887.07,1600 h30 r315; Top Overlay "3v3" at 887.07,1700 h30 r315; Top Overlay "RESET" at 887.07,1800 h30 r315; Top Overlay "IOREF" at 878.39,1910 h30 r315; Top Overlay "NC" at 887.07,2000 h30 r315
J7: Top Overlay "GND" at 3087.07,600 h30 r315; Top Overlay "GND" at 3087.07,700 h30 r315; Top Overlay "GND" at 3087.07,800 h30 r315; Top Overlay "GND" at 3087.07,900 h30 r315; Top Overlay "GND" at 3087.07,1000 h30 r315; Top Overlay "GND" at 3087.07,1100 h30 r315; Top Overlay "GND" at 3078.39,1210 h30 r315; Top Overlay "GND" at 3087.07,1300 h30 r315
J8: Top Overlay "GND" at 587.07,1300 h30 r315; Top Overlay "GND" at 587.07,1400 h30 r315; Top Overlay "GND" at 587.07,1500 h30 r315; Top Overlay "GND" at 587.07,1600 h30 r315; Top Overlay "GND" at 587.07,1700 h30 r315; Top Overlay "GND" at 587.07,1800 h30 r315; Top Overlay "GND" at 578.39,1910 h30 r315; Top Overlay "GND" at 587.07,2000 h30 r315
J9: Top Overlay "GND" at 3150,1447.24 h30 r135; Top Overlay "GND" at 3155,1547.24 h30 r135; Top Overlay "GND" at 3160,1637.24 h30 r135; Top Overlay "GND" at 3155,1742.24 h30 r135; Top Overlay "GND" at 3155,1842.24 h30 r135; Top Overlay "GND" at 3160,1947.24 h30 r135; Top Overlay "GND" at 3160,2042.24 h30 r135; Top Overlay "GND" at 3170,2147.24 h30 r135; Top Overlay "GND" at 3165,2247.24 h30 r135; Top Overlay "GND" at 3160,2347.24 h30 r135
J10: Top Overlay "GND" at 420,700 h30 r135; Top Overlay "GND" at 425,590 h30 r135; Top Overlay "GND" at 405,805 h30 r135; Top Overlay "GND" at 415,915 h30 r135; Top Overlay "GND" at 420,1005 h30 r135; Top Overlay "GND" at 410,1110 h30 r135